# Altium PCB PTW_ECU_Original.PcbDoc
Units mm, origin at the board's own origin, x right, y up, seen from the top; angles counter-clockwise.
Board outline 16 x 29.3 mm, 2 copper layers (Top Layer, Bottom Layer), stack 0.971 mm thick; 25 components, 24 nets, 89 pads, 37 vias.
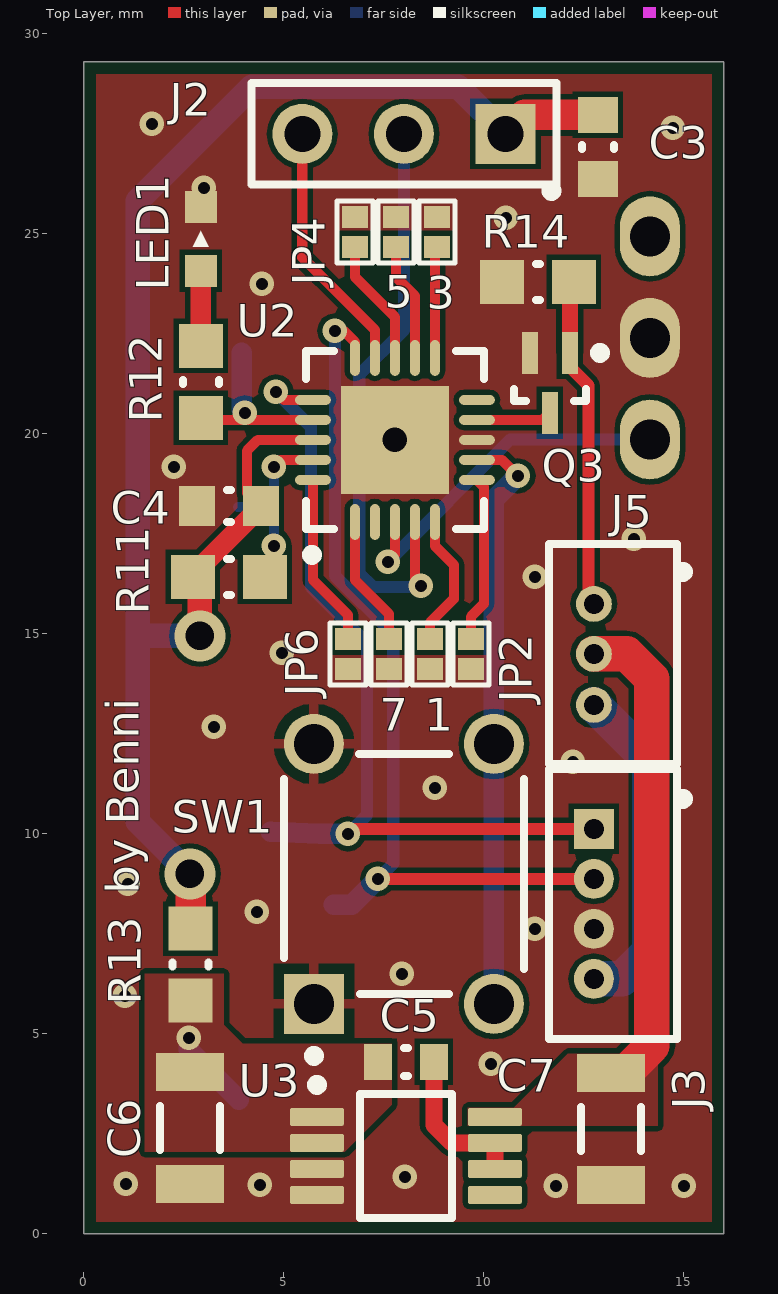
[diagram p0: Top Layer view]
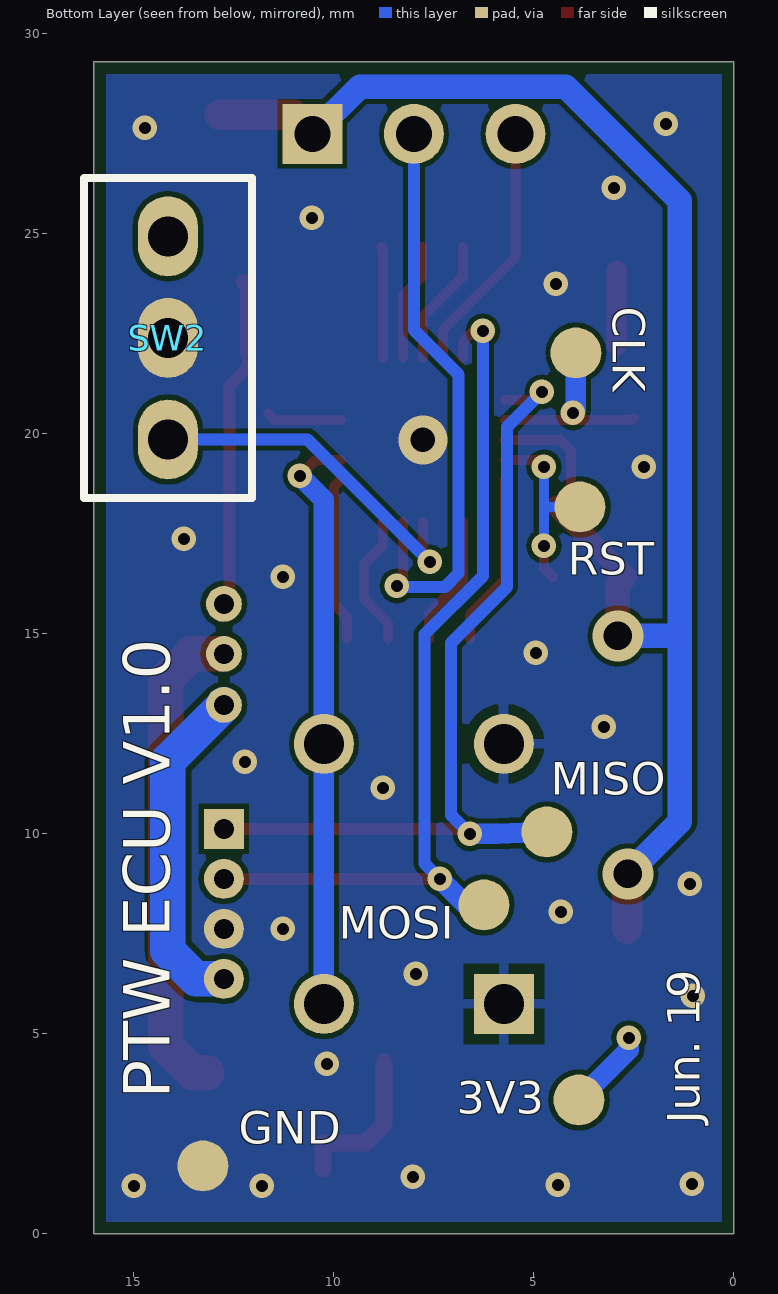
[diagram p1: Bottom Layer view, seen from below]

## Layer stack, top to bottom
Top Solder: solder mask 0.0102, Solder Resist, Dk 3.5
Top Layer: signal copper 0.0356
Dielectric 1: dielectric 0.9, FR-4, Dk 4.8
Bottom Layer: signal copper 0.0356
Bottom Solder: solder mask 0.0102, Solder Resist, Dk 3.5

## Board outline
0,0 16,0 16,29.3 0,29.3

## Design rules (kind name [scope] priority, off if disabled: settings)
BoardOutlineClearance [All] p1: gap=0.3 ignorepadtopadclearanceinfootprint=FALSE
Clearance [All] p1: gap=0.127 ignorepadtopadclearanceinfootprint=FALSE
ComponentClearance [All] p1: gap=0 collisioncheckmode=3 verticalgap=0 showdistances=FALSE
HoleSize [All] p1: absolutevalues=TRUE maxlimit=2.54 minlimit=0.305 maxpercent=80.000 minpercent=20.000
HoleToHoleClearance [All] p1: gap=0.3 allowstackedmicrovias=TRUE
MinimumSolderMaskSliver [All] p1: minsoldermaskwidth=0.051
PlaneConnect [All] p1: planeconnectstyle=Direct reliefexpansion=0.508 reliefentries=4 reliefconductorwidth=0.254 reliefairgap=0.254
PolygonConnect PolygonConnect_SW1 [InNet('GND') vs HasFootprint('OMRON B3F-1006')] p1: connectstyle=Relief reliefconductorwidth=0.254 reliefentries=4 polygonreliefangle="90 Angle" airgapwidth=0.254
PolygonConnect [All] p2: connectstyle=Direct reliefconductorwidth=0.254 reliefentries=4 polygonreliefangle="90 Angle" airgapwidth=0.254
RoutingVias [All] p1: holewidth=0.3 width=0.6 viastyle="Through Hole" minholewidth=0.3 minwidth=0.6 maxholewidth=5.08 maxwidth=63.5
SilkToSilkClearance [All] p1: silktosilkclearance=0.076
SilkToSolderMaskClearance [IsPad] p1: minsilkscreentomaskgap=0.076 clearancetoexposedcopper=TRUE
SolderMaskExpansion [All] p1: expansion=0.102
Width [All] p1: maxlimit=1.524 minlimit=0.127 preferedwidth=0.254
23 further rules are at their usual default settings.

## Components (designator, comment, footprint, x,y, rotation, side; value= is the part's Value field where it differs from the comment)
1 "Jumperpads" Jumper 8.65,14.5 r270 top (schematic designator JP1)
3 "Jumperpads" Jumper 8.825,25.05 r90 top (schematic designator JP3)
5 "Jumperpads" Jumper 7.8,25.05 r90 top (schematic designator JP5)
7 "Jumperpads" Jumper 7.625,14.5 r270 top (schematic designator JP7)
C3 "CAP 100nF 16V 0603" CAPC0603(1608)100_N 12.85,27.175 r90 top value=100nF
C4 "CAP 100nF 16V 0603" CAPC0603(1608)100_N 3.625,18.2 r0 top value=100nF
C5 "680pF 16V 0603" CAPC0603(1608)100_L 8.05,4.3 r0 top value=180pF
C6 "CAP 4.7µF 20V 1206" CAPC1206(3216)190_L 2.65,2.65 r90 top value=100nF
C7 "CAP 4.7µF 6V 1206" CAPC1206(3216)190_L 13.175,2.625 r270 top value=100nF
J2 "801-43-003-10-001000" 801-43-003-10-001000 10.54,27.5 r180 top locked
J3 "0530470410" 530470410 12.75,8.25 r90 top locked
J5 "0530470310" 530470310 13.225,14.5 r90 top locked
JP2 "Jumperpads" Jumper 9.675,14.5 r270 top
JP4 "Jumperpads" Jumper 6.775,25.05 r90 top
JP6 "Jumperpads" Jumper 6.6,14.5 r270 top
LED1 "partNo" WE-LED-0603_RD_N 2.925,24.875 r270 top
Q3 "2N7002BKT,115" NXP-SOT416_B_N 11.65,21.275 r270 top
R11 "10k 1% 0603" RESC0603(1608)_M 3.625,16.425 r0 top value="2.80 Ohm"
R12 "10k 1% 0603" RESC0603(1608)_M 2.925,21.3 r270 top value="2.80 Ohm"
R13 "1R 1% 0603" RESC0603(1608)_M 2.667,6.731 r90 top value="2.80 Ohm"
R14 "10k 1% 0603" RESC0603(1608)_M 11.35,23.8 r0 top value="2.80 Ohm"
SW1 "B3F-1006" "OMRON B3F-1006" 8,9 r90 top locked
SW2 "D2A-1120" D2A-1120 14.15,22.4 r90 bottom locked
U2 "ATtiny2313V-10MU" 20M1_M 7.775,19.85 r90 top
U3 "LP2951ACMM-3.3" DGK0008A_N 8.05,1.95 r0 top

## Footprints (in the part's own frame and the unit in brackets; to place one, negate y for a bottom-side part, rotate by r counter-clockwise, add the part's x,y. Pads: shape width x height; smd on the part's side, far side on the other; paste and mask are expansions set on the pad)
20M1_M [mm] "QFN, 20-Leads, Body 4x4mm, Pitch 0.5mm, Thermal Pad 2.7x2.7mm, IPC Low Density"
  oval 0.9x0.25 smd paste+0.051 mask+0.051: 1(-2.05,1) 2(-2.05,0.5) 3(-2.05,0) 4(-2.05,-0.5) 5(-2.05,-1) 11(2.05,-1) 12(2.05,-0.5) 13(2.05,0) 14(2.05,0.5) 15(2.05,1)
  oval 0.25x0.9 smd paste+0.051 mask+0.051: 6(-1,-2.05) 7(-0.5,-2.05) 8(0,-2.05) 9(0.5,-2.05) 10(1,-2.05) 16(1,2.05) 17(0.5,2.05) 18(0,2.05) 19(-0.5,2.05) 20(-1,2.05)
  rect 2.7x2.7 smd paste-0.203 mask+0: 21(0,0)
  silkscreen extent -3,-2.22 2.23,2.23, body extent -2.07,-2.07 2.08,2.08, height 0.8
801-43-003-10-001000 [mm] "Connector; Header; 3 Position"
  rect 1.5x1.5 hole 0.9 paste+0.051: 1(0,0)
  round 1.5 hole 0.9 paste+0.051: 2(2.54,0) 3(5.08,0)
  silkscreen extent -1.28,-1.27 6.35,1.55, body extent -1.31,-1.28 6.31,1.26, height 7.01
530470310 [mm] "CONN HEADER 3POS 1.25MM VERT TIN"
  round 0.9 hole 0.5 paste+0.051: 1(1.25,0.475) 2(0,0.475) 3(-1.275,0.475)
  silkscreen extent -2.75,-1.88 2.75,1.6, body extent -2.75,-1.6 2.75,1.6, height 4.25
530470410 [mm] "THD, 4-Leads, Body 5.5x3.2mm, Pitch 1.25mm"
  rect 1x1 hole 0.5 paste+0.051: 1(1.875,0)
  round 1 hole 0.5 paste+0.051: 2(0.625,0) 3(-0.625,0) 4(-1.875,0)
  silkscreen extent -3.37,-2.35 3.38,1.12, body extent -3.37,-2.07 3.38,1.13, height 4.18
CAPC0603(1608)100_L [mm] "Chip Capacitor, Body 1.6x0.8mm, Height 1.0mm, IPC High Density"
  rect 0.7x0.9 smd paste+0.051: 1(-0.7,0) 2(0.7,0)
  silkscreen extent -0.05,-0.35 0.05,0.35, body extent -0.87,-0.47 0.88,0.48, height 1
CAPC0603(1608)100_N [mm] "Chip Capacitor, Body 1.6x0.8mm, Height 1.0mm, IPC Medium Density"
  rect 0.9x1 smd paste+0.051: 1(-0.8,0) 2(0.8,0)
  silkscreen extent -0.05,-0.4 0.05,0.4, body extent -0.87,-0.48 0.88,0.47, height 1
CAPC1206(3216)190_L [mm] "Chip Capacitor, Body 3.2x1.6mm, Height 1.9mm, IPC High Density"
  rect 0.95x1.7 smd paste+0.051: 1(-1.4,0) 2(1.4,0)
  silkscreen extent -0.55,-0.75 0.55,0.75, body extent -1.7,-0.9 1.7,0.9, height 1.9
D2A-1120 [mm] "THT tactile switch"
  oval 2x1.5 hole 1 paste+0.051: 1(0,0) 2(2.54,0) 3(-2.54,0)
  silkscreen extent -4,-2.1 4,2.1, body extent -3.99,-2.8 7.01,2.8, height 8
DGK0008A_N [mm] "TSOP, 8-Leads, Body 3.1x3.1mm, Pitch 0.65mm, IPC Medium Density"
  rrect22% 1.35x0.45 smd paste+0.051 mask+0.051: 1(-2.225,0.975) 2(-2.225,0.325) 3(-2.225,-0.325) 4(-2.225,-0.975) 5(2.225,-0.975) 6(2.225,-0.325) 7(2.225,0.325) 8(2.225,0.975)
  silkscreen extent -2.35,-1.55 1.15,1.9, body extent -2.45,-1.5 2.45,1.5, height 0.94
Jumper [mm] "Jumperpads"
  rect 0.55x0.65 smd paste+0.051: 1(-0.375,0) 2(0.375,0)
  silkscreen extent -0.77,-0.45 0.77,0.45
NXP-SOT416_B_N [mm] "SOT23, 3-Leads, Body 1.6x0.8mm, Pitch 0.5mm, IPC Medium Density"
  rect 1.05x0.4 smd paste+0.051: 1(-0.75,0.5) 2(-0.75,-0.5) 3(0.75,0)
  silkscreen extent -0.87,-0.9 0.45,1.38, body extent -0.45,-0.9 0.45,0.9, height 0.95
"OMRON B3F-1006" [mm] "TH, 4-Leads, Body 6x6mm"
  rect 1.5x1.5 hole 1 paste+0.051: 1(-3.25,2.25)
  round 1.5 hole 1 paste+0.051: 2(3.25,2.25) 3(-3.25,-2.25) 4(3.25,-2.25)
  silkscreen extent -4.67,-3 3,3, body extent -3.85,-3 3.85,3, height 4.3
RESC0603(1608)_M [mm] "Chip Resistor, Body 1.6x0.8mm, IPC Low Density"
  rect 1.1x1.1 smd paste+0.051: 1(-0.9,0) 2(0.9,0)
  silkscreen extent -0.05,-0.45 0.05,0.45, body extent -0.85,-0.47 0.85,0.47, height 0.6
WE-LED-0603_RD_N [mm] "Chip LED, Body 1.6x0.8mm red, IPC Medium Density"
  rect 0.8x0.8 smd paste+0.051: 1(-0.8,0) 2(0.8,0)
  silkscreen extent -0.2,-0.2 0.2,0.2, body extent -0.81,-0.4 0.81,0.4, height 0.6

## Part data
C3 C4: library part CMP-1035-02585-1, "CAP 100nF 16V ±20% 0603 (1608 Metric) Thickness 1mm SMD", Case-EIA=0603, Case-Metric=1608, Rated Voltage="16 V", Tolerance=±20%, Max Thickness="1 mm", Technology=SMT
C5: library part CMP-1035-01407-1, "CAP 180pF 16V ±2% 0603 (1608 Metric) Thickness 1mm SMD", Case-EIA=0603, Case-Metric=1608, Rated Voltage="16 V", Tolerance=±2%, Max Thickness="1 mm", Technology=SMT
C6 C7: library part CMP-1037-04189-1, "CAP 100nF 25V ±5% 1206 (3216 Metric) Thickness 1.9mm SMD", Case-EIA=1206, Case-Metric=3216, Rated Voltage="25 V", Tolerance=±5%, Max Thickness="1.9 mm", Technology=SMT
J2: "3 Pim header socket 7mm height", ComponentLink1Description=Datasheet, ComponentLink1URL=https://www.mill-max.com/products/socket/801-xx-xxx-10-001000/801-43-003-10-001000?s_term=801-43-003-10-001000&s_type=Quick%2FProduct%2FPart+Number+Search
J3: "Molex Picoblade, 4Pin THT Straight", ComponentLink1Description=Datasheet, ComponentLink1URL=http://www.molex.com/pdm_docs/sd/530470410_sd.pdf
J5: "Molex Picoblade, 3Pin THT Straight", Supplier Part Number 1=538-53047-0310, ComponentLink1Description=Datasheet, ComponentLink1URL=http://www.molex.com/pdm_docs/sd/530470310_sd.pdf, Supplier 1=Mouser, Supplier 2=Digi-Key, Supplier Part Number 2=WM1732-ND
LED1: library part LED_0603_RD, "Chip LED 0603 red", Color=red, Current=?, Package / Case="0603 (1608 metric)", Abstrahlwinkel=180°, Brightness=?, Dicke=0.35mm, Spannung - Nenn=?
Q3: library part CMP-1259-00271-1, "N-Channel Trench MOSFET, 60 V, 0.29 A, -55 to 150 degC, 3-Pin SOT416, Tape and Reel", Manufacturer="NXP Semiconductors", Automotive Qualified=Y, Channel Type=N, Code_JEITA=SC-75, ComponentLink1Description="Manufacturer URL", ComponentLink1URL=http://www.nxp.com/, ComponentLink2Description=Datasheet, ComponentLink2URL=http://www.nxp.com/documents/data_sheet/2N7002BKT.pdf, ComponentLink3Description="Package Specification", ComponentLink3URL=http://www.nxp.com/documents/data_sheet/2N7002PT.pdf, DatasheetVersion="Rev. 1", ID [max] (A)=0.29, IDM [max] (A)=1.2, Mounting Technology="Surface Mount", PackageDescription="3-Pin Small Outline Transistor Package, Body 1.6 x 0.8 mm, Pitch 0.5 mm", PackageReference=SOT416_B, PackageVersion="06-03-16, 03/2006", Packing="Tape & Reel", PartNumber=2N7002BKT,115, VDS [max] (V)=60, VGSth [typ] (V)=1.6
R11 R12 R13 R14: library part CMP-1012-00220-1, "2R8 0.1W 1% 0603 (1608 Metric)  SMD", Case-EIA=0603, Case-Metric=1608, Power="0.1 W", Tolerance="1 %", Technology=SMT
SW1: "Tactile Switch Omron B3F-1006", Contact Resistance=50mOhm, ComponentLink1Description=Datasheet, ComponentLink1URL=https://omronfs.omron.com/en_US/ecb/products/pdf/en-b3f.pdf, Manufacture specification=B3F-1006, Travel=0.25mm
SW2: "SWITCH TACTILE Omron D2A 0.1A 30V", Contact resistence="50mO max.", Current Rating="0.1A @ 30VDC", Manufacturer=Omron, Manufacturer Part=MK-12C02-PB, Operating force=50gf±1gf, Operating Temperature="-10°C ~ 80°C", Actuator Type=Standard, ComponentLink1Description="Manufacturer URL", ComponentLink1URL=http://components.omron.eu/, ComponentLink2Description=Datasheet, ComponentLink2URL=https://omronfs.omron.com/en_US/ecb/products/pdf/en-d2a.pdf, Insulation="100MO min.", Mounting Type="Through Hole", Switch Function=On-On
U2: library part CMP-0093-00093-2, "Low Power tinyAVR® 8-Bit Microcontroller, 1.8-5.5V, 10MHz, 2K Flash Memory, Industrial Grade (-40°C to 85°C), 20-Lead MLF, Pb-Free", Code_JEDEC=MO-220WGGD-5, ComponentLink1Description="Manufacturer URL", ComponentLink1URL=http://www.atmel.com/, ComponentLink2Description="ATtiny2313 Datasheet", ComponentLink2URL=http://www.atmel.com/dyn/resources/prod_documents/doc2543.pdf, ComponentLink3Description="ATtiny2313 Summary", ComponentLink3URL=http://www.atmel.com/dyn/resources/prod_documents/doc2543S.pdf, DatasheetVersion="revL, Aug-2010", PackageDescription="20-pad, 4 x 4 x 0.8 mm Body, Lead Pitch 0.50 mm, 2.6 mm Exposed Pad, Micro Lead Frame Package (MLF)", PackageReference=20M1, PackageVersion="revA, Oct-2004", RevisionNote="DatasheetVersion updated. DAP pin added. URLs added."
U3: library part CMP-0062-02229-3, "Series of Adjustable Micropower Voltage Regulators, 8-pin Mini SOIC", Manufacturer="Texas Instruments", PackageTopMarking=ZXTT*L0CA, PowerWise=N, Code_JEDEC=MO-187-AA, ComponentLink1Description="Datasheet URL", ComponentLink1URL=http://www.ti.com/general/docs/lit/getliterature.tsp?genericPartNumber=LP2951-N&fileType=pdf, CompType="LDO IC", PackageDescription="MINI SOIC, .118 x .118 x .034in, 8 Lead, .0256in Pitch", PackageReference=DGK0008A, PinCount=8, RoHS=N

## Free pads (board coordinates)
  round 1.27 smd far side paste+0.051: 2(3.85,18.175) 2(3.875,3.35) 2(3.95,22.025) 2(4.675,10.05) 2(6.25,8.225) 2(13.275,1.7)

## Via types
v1: diameter 0.61, hole 0.305, Top Layer to Bottom Layer, tented both sides, 34 vias
v2: diameter 1.27, hole 0.711, Top Layer to Bottom Layer, tented both sides, 2 vias
v3: diameter 1.219, hole 0.61, Top Layer to Bottom Layer, tented both sides, 1 vias

## Nets (pads, with @x,y where several pads share a name; then routed paths per layer and width w, separated by ;. In a path a pad name is that pad's centre, name@x,y a point inside that pad or via, vN(x,y) a via of type N, cw(c..) or ccw(c..) an arc to the next point about the centre after c; other vN are vias at no path point)
3V3: C5.1 C6.2 pad.2@3.875,3.35 R13.1 U3.1 U3.2 | length 2.1
  Bottom Layer w0.508: v1(2.625,4.9) 2.625,4.6 pad.2@3.875,3.35
12V: C7.1 J5.2 U3.8 | length 12.2
  Top Layer w0.889: J5.2 13.575,14.5 14.2,13.875 14.2,4.7 13.525,4.025 C7.1
FA_signal: J5.1 Q3.1 R14.2 | length 8.3
  Top Layer w0.305: Q3.1 12.15,21.675 12.612,21.213 12.612,15.888 J5.1
  Top Layer w0.406: Q3.1 12.15,23.7 R14.2
FA_signal_µC: Q3.3 U2.9 | length 1.9
  Top Layer w0.254: U2.9 11.475,20.35 Q3.3
GND: 1.2 3.2 5.2 7.2 C3.1 C4.1 C6.1 C7.2 J3.3 JP2.2 JP4.2 JP6.2 LED1.1 pad.2@13.275,1.7 Q3.2 R14.1 SW1.1 SW1.2 SW2.1 U2.8 U2.21 U3.3 U3.4
  other v1: 11.8,1.2 15,1.2 4.4,1.225 1.05,1.25 8.025,1.425 10.175,4.25 1.025,5.95 7.95,6.5 11.275,7.625 4.325,8.05 1.1,8.75 8.775,11.15 12.225,11.8 3.25,12.675 4.95,14.525 11.275,16.425 13.75,17.375 2.25,19.175 4.45,23.75 10.55,25.4 3,26.15 14.725,27.65 1.7,27.75
  other v3: 7.775,19.85
Jumper1: 1.1 U2.5 | length 3.4
  Top Layer w0.254: 1.1 8.65,15.275 9.25,15.875 9.25,16.725 8.775,17.2 U2.5
Jumper2: JP2.1 U2.6 | length 4.2
  Top Layer w0.254: JP2.1 9.675,15.425 10,15.75 10,18.675 U2.6
Jumper3: 3.1 U2.11 | length 2.8
  Top Layer w0.254: U2.11 8.775,24.625 3.1
Jumper4: JP4.1 U2.13 | length 3.2
  Top Layer w0.254: JP4.1 6.775,23.925 7.775,22.925 U2.13
Jumper5: 5.1 U2.12 | length 3
  Top Layer w0.254: 5.1 7.8,23.925 8.275,23.45 U2.12
Jumper6: JP6.1 U2.20 | length 4.3
  Top Layer w0.254: U2.20 5.725,16.35 6.6,15.475 JP6.1
Jumper7: 7.1 U2.1 | length 3.3
  Top Layer w0.254: U2.1 6.775,16.35 7.625,15.5 7.1
LS_Input: J2.2 U2.4 | length 14.8
  Top Layer w0.254: U2.4 8.275,16.35 v1(8.425,16.2)
  Bottom Layer w0.305: J2.2 8,22.6 6.886,21.486 6.886,16.514 7.225,16.175 8.4,16.175 v1(8.425,16.2)
LS_Out: J2.3 U2.14 | length 6.4
  Top Layer w0.254: J2.3 5.46,24.415 7.275,22.6 U2.14
Mag_Detect: SW2.3 U2.3 | length 8.9
  Top Layer w0.254: v1(7.6,16.8) 7.775,16.975 U2.3
  Bottom Layer w0.305: v1(7.6,16.8) 10.66,19.86 SW2.3
N-Fet: J3.1 pad.2@4.675,10.05 U2.16 | length 21.3
  Top Layer w0.254: v1(4.8,21.05) 5,20.85 U2.16
  Top Layer w0.305: v1(6.6,10) 6.725,10.125 J3.1
  Bottom Layer w0.305: v1(4.8,21.05) 5.675,20.175 5.675,16.175 7.075,14.775 7.075,10.475 v1(6.6,10)
  Bottom Layer w0.508: pad.2@4.675,10.05 5.9,10 v1(6.6,10)
NetC5_2: C5.2 U3.6 U3.7 | length 3.9
  Top Layer w0.432: C5.2 8.75,2.725 9.2,2.275 U3.7 U3.6
NetJ3_4: J3.4 J5.3 | length 8.4
  Bottom Layer w0.889: J3.4 13.45,6.375 14.15,7.075 14.15,11.825 J5.3
NetLED1_2: LED1.2 R12.1 | length 1.9
  Top Layer w0.508: R12.1 LED1.2
NetR11_2: pad.2@3.85,18.175 R11.2 U2.19 | length 4.8
  Top Layer w0.254: R11.2 4.75,16.65 v1(4.75,17.2) ; v1(4.75,19.175) 4.925,19.35 U2.19
  Bottom Layer w0.254: pad.2@3.85,18.175 4.75,18.175 ; v1(4.75,17.2) 4.75,18.175 ; v1(4.75,19.175) 4.75,18.175
NetR12_2: pad.2@3.95,22.025 R12.2 U2.17 | length 4.8
  Top Layer w0.254: R12.2@2.5,20.4 2.55,20.35 U2.17
  Bottom Layer w0.508: pad.2@3.95,22.025 3.95,20.6 v1(4.025,20.525)
P-Fet: J3.2 pad.2@6.25,8.225 U2.15 | length 22.2
  Top Layer w0.254: v1(6.275,22.575) 6.5,22.575 6.775,22.3 U2.15
  Top Layer w0.305: v1(7.35,8.875) J3.2
  Bottom Layer w0.305: v1(6.275,22.575) 6.275,16.45 7.732,14.993 7.732,9.257 v1(7.35,8.875)
  Bottom Layer w0.508: pad.2@6.25,8.225 6.7,8.225 v1(7.35,8.875)
Trigger_Signal: SW1.3 SW1.4 U2.7 | length 14.6
  Top Layer w0.254: U2.7 10.45,19.35 v1(10.85,18.95)
  Bottom Layer w0.508: SW1.3 SW1.4 10.25,18.35 v1(10.85,18.95)
VCC: C3.2 C4.2 J2.1 R11.1 R13.2 U2.18 | length 41
  Top Layer w0.254: C4.2 4.4,18.2 4.075,18.525 4.075,19.575 4.35,19.85 U2.18
  Top Layer w0.508: R11.1 2.725,16.475 4.425,18.175 C4.2
  Top Layer w0.61: R11.1 2.9,16.25 v2(2.9,14.95)
  Top Layer w0.762: v2(2.65,9) 2.667,8.983 R13.2 ; J2.1 11.015,27.975 C3.2
  Bottom Layer w0.61: v2(2.65,9) 1.35,10.3 1.35,14.975 ; v2(2.9,14.95) 1.375,14.95 1.35,14.975 ; J2.1 9.358,28.682 4.2,28.682 1.35,25.832 1.35,14.975
pads on no net: SW2.2 U2.2 U2.10 U3.5

## Polygon pours and split planes (outlines as drawn)
GND on Top Layer "TopGND" (solid, remove dead copper, pour order 5): 0,0 16,0 16,29.3 0,29.3
3V3 on Top Layer "Top3V3" (solid, remove dead copper, pour order 4): 6.525,2.05 1.525,2.05 1.525,6.5 3.5,6.5 3.5,5.225 3.975,4.75 7.7,4.75 7.7,3.225
12V on Top Layer "Top12V" (solid, remove dead copper, pour order 2): 9.6,2.7 14.35,2.7 14.35,4.5 12.1,4.5 10.75,3.15 9.6,3.15
GND on Bottom Layer "BotGND" (solid, remove dead copper, pour order 7): 0,0 16,0 16,29.3 0,29.3

## Silkscreen, mask and mechanical layers (free items; w line width, h text height)
Top Overlay:
  text "by Benni" at 1.375,8.5 h0.81 r90
Bottom Overlay:
  text "CLK" at 3.025,23.175 h0.81 r90
  text "RST" at 4.15,16.475 h0.81
  text "MISO" at 4.575,10.975 h0.81
  text "MOSI" at 9.875,7.375 h0.81
  text "PTW ECU V1.0" at 14.1,3.375 h1.17 r270
  text "3V3" at 6.925,3 h0.81
  text "Jun. 19" at 0.85,2.75 h0.81 r270
  text "GND" at 12.375,2.25 h0.81
Mechanical 1:
  the board outline again, w0.051